# Altium PCB LED1.PcbDoc
Units mm, origin at the board's own origin, x right, y up, seen from the top; angles counter-clockwise.
Board outline 85.09 x 33.02 mm, 2 copper layers (Top Layer, Bottom Layer); 23 components, 9 nets, 65 pads, 0 vias.
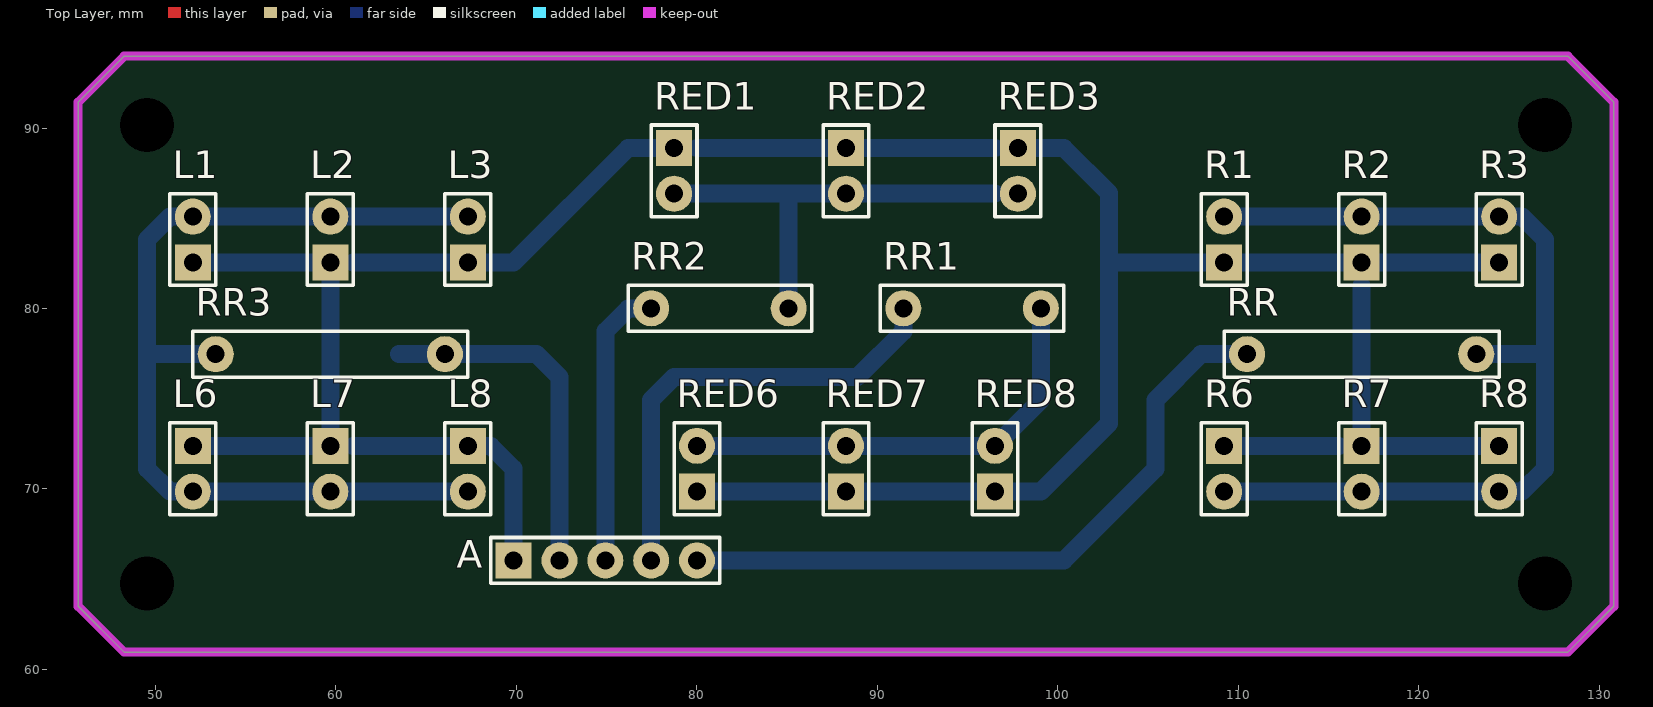
[diagram p0: Top Layer view]
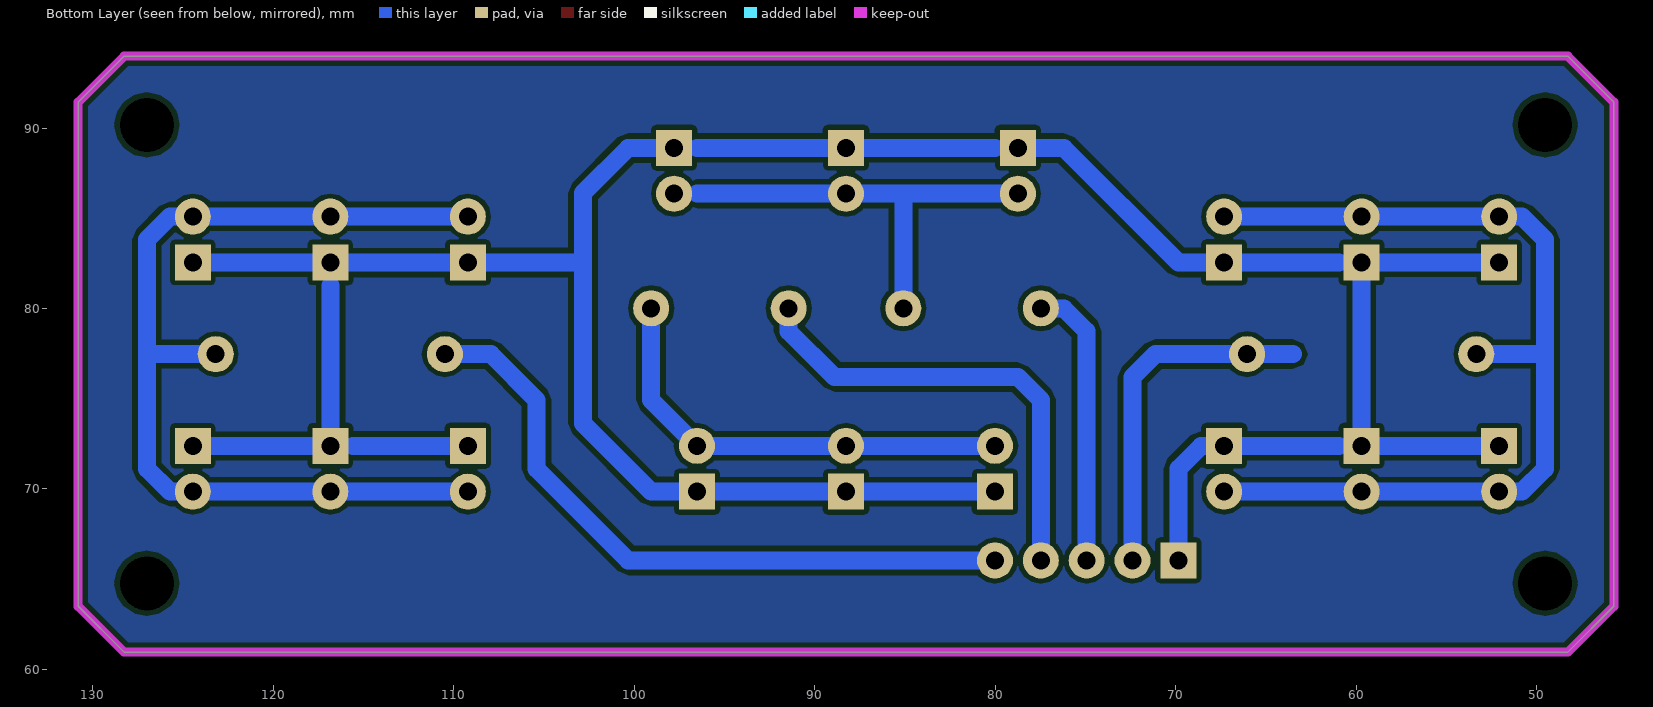
[diagram p1: Bottom Layer view, seen from below]

## Layer stack, top to bottom
Top Solder: solder mask 0.0102, Solder Resist, Dk 3.5
Top Layer: signal copper 0.0356
Dielectric 1: dielectric 0.32, FR-4, Dk 4.8
Bottom Layer: signal copper 0.0356
Bottom Solder: solder mask 0.0102, Solder Resist, Dk 3.5

## Board outline
48.26,60.96 45.72,63.5 45.72,91.44 48.26,93.98 128.27,93.98 130.81,91.44 130.81,63.5 128.27,60.96

## Design rules (kind name [scope] priority, off if disabled: settings)
Clearance [All] p1: gap=0.254 ignorepadtopadclearanceinfootprint=FALSE except(0: Arc-Hole Track-Hole SMDPad-Hole THPad-Hole Via-Hole Fill-Hole Poly-Hole Region-Hole Text-Hole)
PolygonConnect [All] p1: connectstyle=Relief reliefconductorwidth=0.254 reliefentries=4 polygonreliefangle="90 Angle" airgapwidth=0.254
RoutingVias [All] p1: holewidth=0.711 width=1.27 viastyle="Through Hole" minholewidth=0.711 minwidth=1.27 maxholewidth=0.711 maxwidth=1.27
SolderMaskExpansion [All] p1: expansion=0.102
Width [All] p1: maxlimit=2 minlimit=0.254 preferedwidth=1
30 further rules are at their usual default settings.

## Components (designator, comment, footprint, x,y, rotation, side; value= is the part's Value field where it differs from the comment)
A "Header 5" HDR1X5 80.01,66.04 r180 top
L1 "Header 2" HDR1X2 52.07,85.09 r270 top
L2 "Header 2" HDR1X2 59.69,85.09 r270 top
L3 "Header 2" HDR1X2 67.31,85.09 r270 top
L6 "Header 2" HDR1X2 52.07,69.85 r90 top
L7 "Header 2" HDR1X2 59.69,69.85 r90 top
L8 "Header 2" HDR1X2 67.31,69.85 r90 top
R1 "Header 2" HDR1X2 109.22,85.09 r270 top
R2 "Header 2" HDR1X2 116.84,85.09 r270 top
R3 "Header 2" HDR1X2 124.46,85.09 r270 top
R6 "Header 2" HDR1X2 109.22,69.85 r90 top
R7 "Header 2" HDR1X2 116.84,69.85 r90 top
R8 "Header 2" HDR1X2 124.46,69.85 r90 top
RED1 "Header 2" HDR1X2 78.74,86.36 r90 top
RED2 "Header 2" HDR1X2 88.265,86.36 r90 top
RED3 "Header 2" HDR1X2 97.79,86.36 r90 top
RED6 "Header 2" HDR1X2 80.01,72.39 r270 top
RED7 "Header 2" HDR1X2 88.265,72.39 r270 top
RED8 "Header 2" HDR1X2 96.52,72.39 r270 top
RR "Header 6" HDR1X6 123.19,77.47 r180 top
RR1 "Header 4" HDR1X4 99.06,80.01 r180 top
RR2 "Header 4" HDR1X4 85.09,80.01 r180 top
RR3 "Header 6" HDR1X6 53.34,77.47 r0 top

## Footprints (in the part's own frame and the unit in brackets; to place one, negate y for a bottom-side part, rotate by r counter-clockwise, add the part's x,y. Pads: shape width x height; smd on the part's side, far side on the other; paste and mask are expansions set on the pad)
HDR1X2 [mm] "Connector; Header; 2 Position"
  round 2 hole 1: 1(0,0)
  rect 2x2 hole 1: 2(2.54,0)
  silkscreen extent -1.27,-1.27 3.81,1.27
HDR1X4 [mm] "Connector; Header; 4 Position"
  round 2 hole 1: 1(0,0) 4(7.62,0)
  round 0 all layers, no hole: 2(2.54,0) 3(5.08,0)
  silkscreen extent -1.27,-1.27 8.89,1.27
HDR1X5 [mm] "Connector; Header; 5 Position"
  round 2 hole 1: 1(0,0) 2(2.54,0) 3(5.08,0) 4(7.62,0)
  rect 2x2 hole 1: 5(10.16,0)
  silkscreen extent -1.27,-1.27 11.43,1.27
HDR1X6 [mm] "Connector; Header; 6 Position"
  round 2 hole 1: 1(0,0) 6(12.7,0)
  round 0 all layers, no hole: 2(2.54,0) 3(5.08,0) 4(7.62,0) 5(10.16,0)
  silkscreen extent -1.27,-1.27 13.97,1.27

## Part data
A: "Header, 5-Pin", LatestRevisionDate=17-Jul-2002, LatestRevisionNote="Re-released for DXP Platform.", Publisher="Altium Limited"
L1 L2 L3 L6 L7 L8 R1 R2 R3 R6 R7 R8 RED1 RED2 RED3 RED6 RED7 RED8: "Header, 2-Pin", LatestRevisionDate=17-Jul-2002, LatestRevisionNote="Re-released for DXP Platform.", Publisher="Altium Limited"
RR RR3: "Header, 6-Pin", LatestRevisionDate=17-Jul-2002, LatestRevisionNote="Re-released for DXP Platform.", Publisher="Altium Limited"
RR1 RR2: "Header, 4-Pin", LatestRevisionDate=17-Jul-2002, LatestRevisionNote="Re-released for DXP Platform.", Publisher="Altium Limited"

## Free pads (board coordinates)
  round 0 hole 3: 3(49.53,64.77) 4(49.53,90.17) 7(127,90.17) 8(127,64.77)

## Nets (pads, with @x,y where several pads share a name; then routed paths per layer and width w, separated by ;. In a path a pad name is that pad's centre, name@x,y a point inside that pad or via, vN(x,y) a via of type N, cw(c..) or ccw(c..) an arc to the next point about the centre after c; other vN are vias at no path point)
GND: A.5 L1.2 L2.2 L3.2 L6.2 L7.2 L8.2 R1.2 R2.2 R3.2 R6.2 R7.2 R8.2 RED1.2 RED2.2 RED3.2 RED6.2 RED7.2 RED8.2 | length 164.5
  Bottom Layer w1: L6.2 L7.2 L2.2 L1.2 ; 60.96,72.39 L8.2 68.58,72.39 69.85,71.12 A.5 ; 60.96,82.55 L3.2 69.85,82.55 76.2,88.9 RED1.2 ; RED6.2 RED7.2 RED8.2 99.06,69.85 102.84,73.63 102.84,82.55 ; 80.01,88.9 RED2.2 96.52,88.9 ; RED3.2 100.33,88.9 102.84,86.39 102.84,82.55 ; R6.2 115.57,72.39 ; 116.84,81.28 R7.2 R8.2 ; R3.2 R2.2 R1.2 102.84,82.55
NetA_1: A.1 RR.6 | length 37.4
  Bottom Layer w1: A.1 100.33,66.04 105.41,71.12 105.41,74.93 107.95,77.47 RR.6
NetA_2: A.2 RR1.4 | length 25.7
  Bottom Layer w1: A.2 77.47,74.93 78.74,76.2 88.9,76.2 91.44,78.74 RR1.4
NetA_3: A.3 RR2.4 | length 15.8
  Bottom Layer w1: A.3 74.93,78.74 76.2,80.01 RR2.4
NetA_4: A.4 RR3.6 | length 19.6
  Bottom Layer w1: 63.5,77.47 RR3.6 71.12,77.47 72.39,76.2 A.4
NetL1_1: L1.1 L2.1 L3.1 L6.1 L7.1 L8.1 RR3.1 | length 53.1
  Bottom Layer w1: RR3.1 49.53,77.47 ; L8.1 L7.1 L6.1 50.8,69.85 49.53,71.12 49.53,77.47 ; L3.1 L2.1 L1.1 50.8,85.09 49.53,83.82 49.53,77.47
NetR1_1: R1.1 R2.1 R3.1 R6.1 R7.1 R8.1 RR.1 | length 53.1
  Bottom Layer w1: R6.1 R7.1 R8.1 125.73,69.85 127,71.12 127,77.47 ; R1.1 R2.1 R3.1 125.73,85.09 127,83.82 127,77.47 ; RR.1 127,77.47
NetRED1_1: RED1.1 RED2.1 RED3.1 RR2.1 | length 24.1
  Bottom Layer w1: RED1.1 85.09,86.36 ; RR2.1 85.09,86.36 ; 96.52,86.36 RED2.1 85.09,86.36
NetRED6_1: RED6.1 RED7.1 RED8.1 RR1.1 | length 25.2
  Bottom Layer w1: RED6.1 RED7.1 RED8.1 99.06,74.93 RR1.1
pads on no net: RR1.2 RR1.3 RR2.2 RR2.3 RR3.2 RR3.3 RR3.4 RR3.5 RR.2 RR.3 RR.4 RR.5

## Polygon pours and split planes (outlines as drawn)
no net on Bottom Layer "Top Layer-No Net" (solid, pour order 4): 48.26,60.96 45.72,63.5 45.72,91.44 48.26,93.98 128.27,93.98 130.81,91.44 130.81,63.5 128.27,60.96

## Keep-outs
Keep-Out Layer:
  the board outline again, w0.5